# Altium PCB PCB_Audio Output.pcbdoc
Units mm, origin at the board's own origin, x right, y up, seen from the top; angles counter-clockwise.
Board outline 117.35 x 91.82 mm, 2 copper layers (Top Layer, Bottom Layer); 22 components, 13 nets, 84 pads, 0 vias.
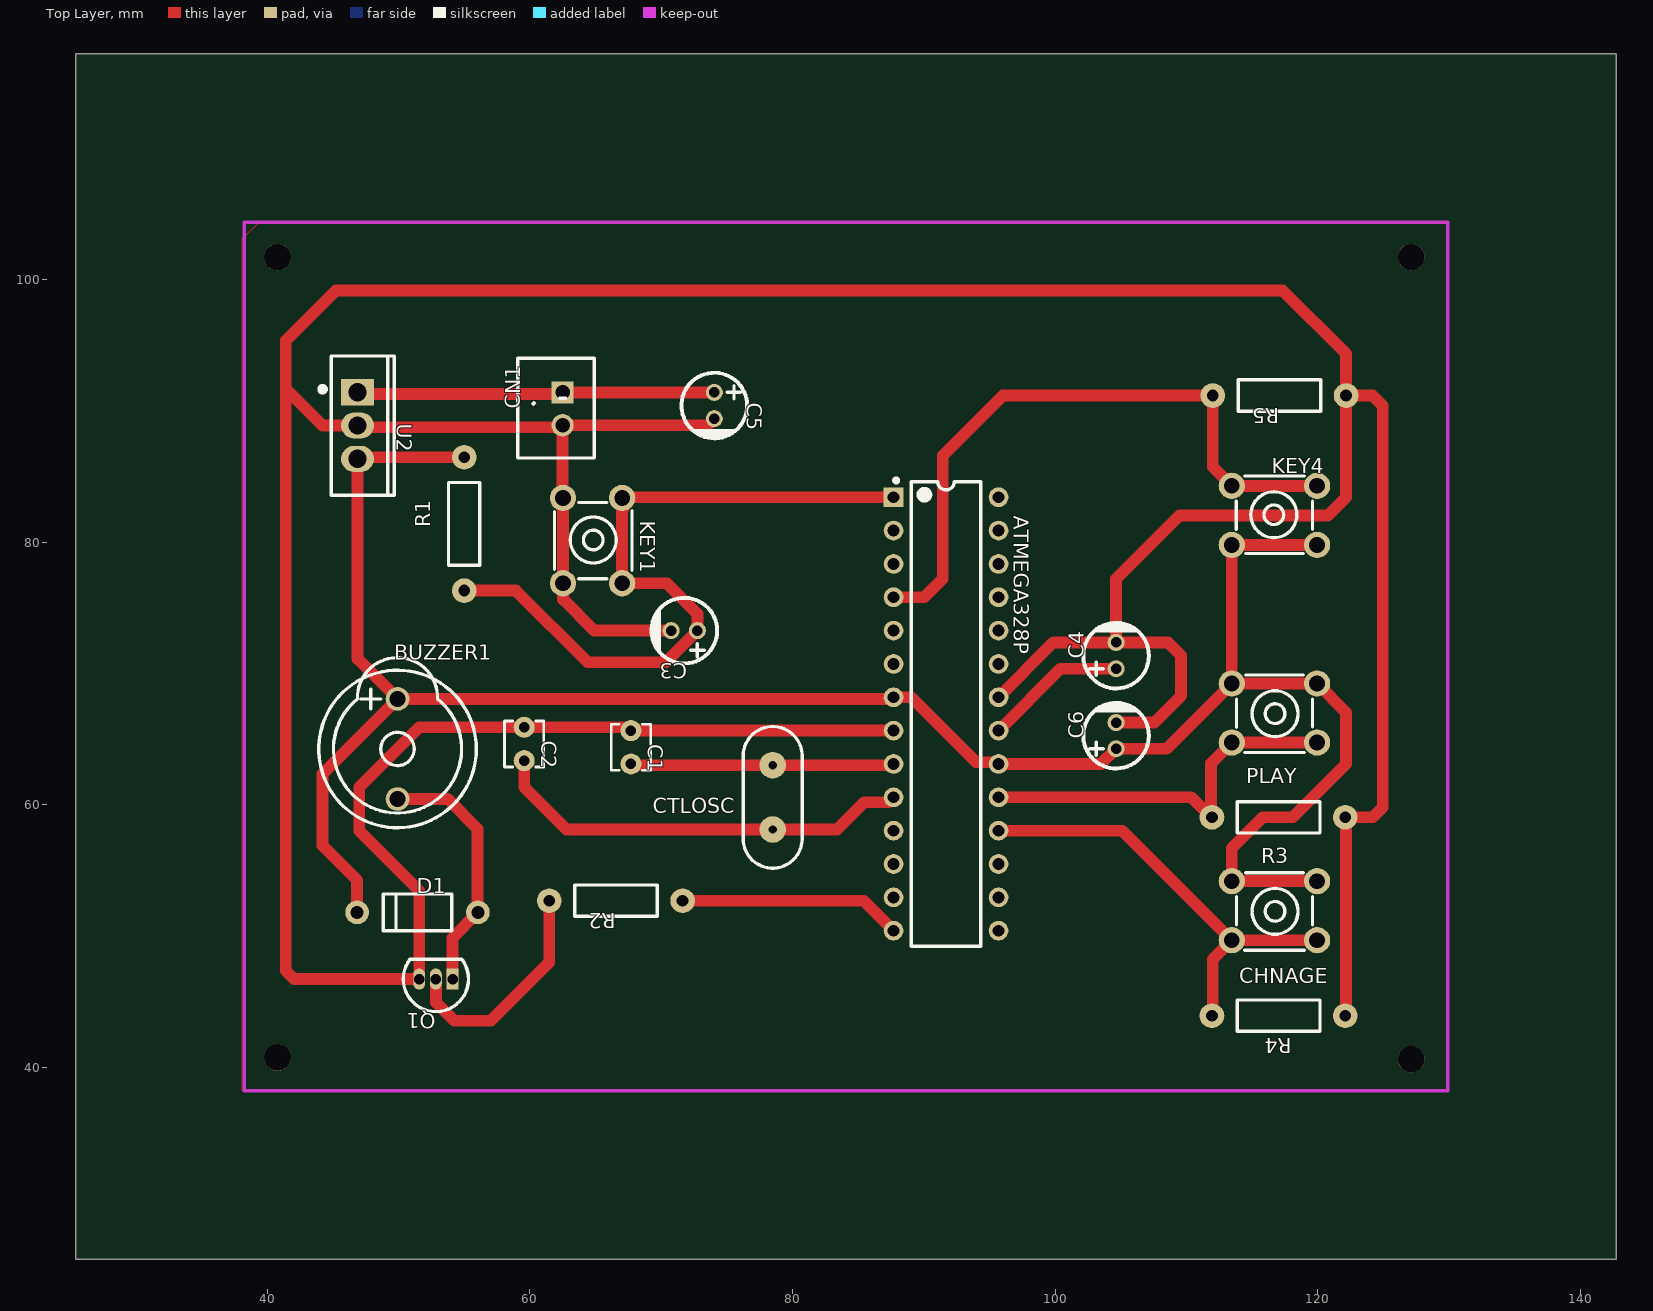
[diagram p0: Top Layer view]
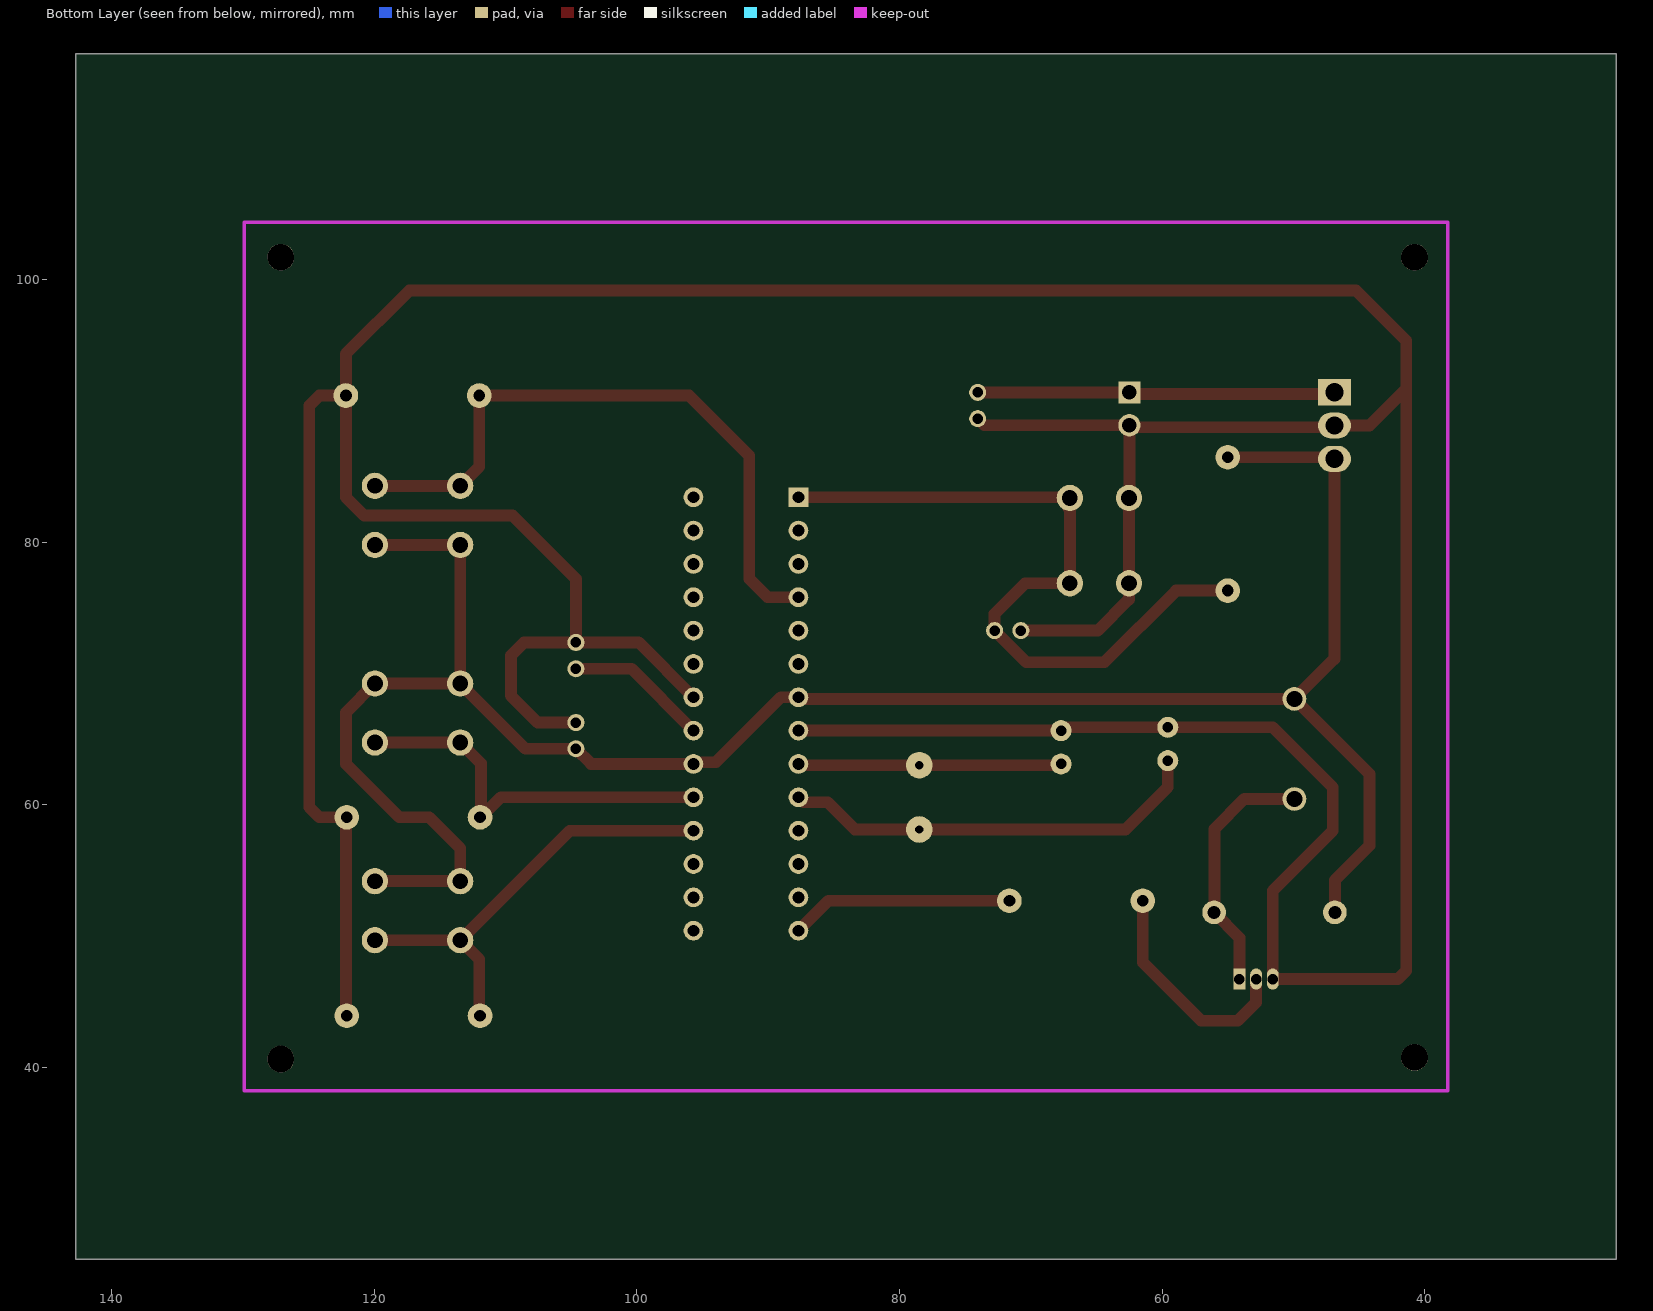
[diagram p1: Bottom Layer view, seen from below]

## Layer stack, top to bottom
Top Layer: signal copper (thickness not stored)
Dielectric: dielectric 0.32, FR-4, Dk 4.8
Bottom Layer: signal copper (thickness not stored)

## Board outline
142.748,25.4 25.4,25.4 25.4,117.221 142.748,117.221

## Components (designator, comment, footprint, x,y, rotation, side; value= is the part's Value field where it differs from the comment)
ATMEGA328P "ATMEGA _328P-PU" DIP-28_L34.6-W7.3-P2.54-LS10.2-BL 91.694,66.929 r270 top
BUZZER1 "5V_BUZZER" DIP-BUZZER-12X6 49.911,64.262 r0 top
C1 "22pF" CAP-TH_L3.5-W3.0-P2.54-D0.8 67.691,64.389 r270 top
C2 "22pF" CAP-TH_L3.5-W3.0-P2.54-D0.8 59.563,64.643 r270 top
C3 "100nF" CAP-TH_BD5.0-P2.00-D0.8-FD 71.755,73.279 r180 top
C4 "100nF" CAP-TH_BD5.0-P2.00-D0.8-FD 104.648,71.374 r90 top
C5 "330nF" CAP-TH_BD5.0-P2.00-D0.8-FD 74.041,90.424 r270 top
C6 "100nF" CAP-TH_BD5.0-P2.00-D0.8-FD 104.648,65.278 r90 top
CHNAGE "CHANGE SONG" KEY-TH_4P-L6.0-W6.0-P4.50 116.713,51.943 r180 top
CN1 "JST_2 PIN" CONN-TH_XHB-2A 62.484,90.17 r90 top
CTLOSC "16MHz" "16MHZ_OSC [PCB]" 78.486,60.579 r0 top
D1 "1N4001_Diode" DO-41_BD2.4-L4.7-P8.70-D0.9-RD 51.435,51.816 r0 top
KEY1 "Reset_Button" KEY-TH_4P-L6.0-W6.0-P4.50 64.77,80.137 r270 top
KEY4 "STOP" KEY-TH_4P-L6.0-W6.0-P4.50 116.713,82.057 r0 top
PLAY "PLAY" KEY-TH_4P-L6.0-W6.0-P4.50 116.713,67 r180 top
Q1 "BC547B_NPN_Transistor" TO-92-3_L4.9-W3.7-P1.27-L 52.832,46.736 r180 top
R1 "10K" AXIAL-0.4 54.991,81.407 r90 top
R2 "220Ω" AXIAL-0.4 66.548,52.705 r180 top
R3 "330Ω" AXIAL-0.4 117.03,59.055 r180 top
R4 "330Ω" AXIAL-0.4 117.03,43.942 r180 top
R5 "330Ω" AXIAL-0.4 117.094,91.186 r180 top
U2 "7805_Regulator" TO-220-3_L10.0-W4.5-P2.54-L 46.863,88.9 r270 top

## Footprints (in the part's own frame and the unit in brackets; to place one, negate y for a bottom-side part, rotate by r counter-clockwise, add the part's x,y. Pads: shape width x height; smd on the part's side, far side on the other; paste and mask are expansions set on the pad)
"16MHZ_OSC [PCB]" [mil]
  round 80 hole 25: 1(0,96.46) 2(0,-96.46)
  silkscreen extent -88,-212 88,212
AXIAL-0.4 [mil]
  round 74 hole 35.4: 1(-200,0) 2(200,0)
  silkscreen extent -124,-47 124,47
CAP-TH_BD5.0-P2.00-D0.8-FD [mm]
  round 1.3 hole 0.8: 1(-1,0) 2(1,0)
  silkscreen extent -2.5,-2.5 2.5,2.5
CAP-TH_L3.5-W3.0-P2.54-D0.8 [mm]
  round 1.6 hole 0.8: 1(-1.27,0) 2(1.27,0)
  silkscreen extent -1.75,-1.5 1.75,1.5
CONN-TH_XHB-2A [mm]
  rect 1.7x1.7 hole 1.1: 1(1.251,0)
  round 1.7 hole 1.1: 2(-1.251,0)
  silkscreen extent -3.75,-2.42 3.86,3.4
DIP-28_L34.6-W7.3-P2.54-LS10.2-BL [mm]
  rect 1.5x1.5 hole 0.9: 1(-16.51,-4)
  round 1.5 hole 0.9: 2(-13.97,-4) 3(-11.43,-4) 4(-8.89,-4) 5(-6.35,-4) 6(-3.81,-4) 7(-1.27,-4) 8(1.27,-4) 9(3.81,-4) 10(6.35,-4) 11(8.89,-4) 12(11.43,-4) 13(13.97,-4) 14(16.51,-4) 15(16.51,4) 16(13.97,4) 17(11.43,4) 18(8.89,4) 19(6.35,4) 20(3.81,4) 21(1.27,4) 22(-1.27,4) 23(-3.81,4) 24(-6.35,4) 25(-8.89,4) 26(-11.43,4) 27(-13.97,4) 28(-16.51,4)
  silkscreen extent -17.94,-3.95 17.7,2.65
DIP-BUZZER-12X6 [mm]
  round 1.8 hole 1.2: 1(0,3.81) 2(0,-3.81)
  silkscreen extent -6,-6 6,6.96
DO-41_BD2.4-L4.7-P8.70-D0.9-RD [mm]
  round 1.8 hole 1: 1(-4.6,0) 2(4.6,0)
  silkscreen extent -2.6,-1.4 2.6,1.4
KEY-TH_4P-L6.0-W6.0-P4.50 [mm]
  round 2 hole 1.2: 1(-3.25,-2.25) 2(3.25,-2.25) 3(3.25,2.25) 4(-3.25,2.25)
  silkscreen extent -2.9,-2.9 2.9,3
TO-92-3_L4.9-W3.7-P1.27-L [mm]
  rect 0.9x1.6 hole 0.8: 1(-1.27,0)
  oval 0.9x1.6 hole 0.8: 2(0,0) 3(1.27,0)
  silkscreen extent -2.48,-1.5 2.48,2.48
TO-220-3_L10.0-W4.5-P2.54-L [mm]
  rect 2x2.5 hole 1.4: 1(-2.54,0)
  oval 2x2.5 hole 1.4: 2(0,0) 3(2.54,0)
  silkscreen extent -5.3,-2.86 5.3,2.8

## Free pads (board coordinates)
  round 2.032 hole 2.032 unplated: ""(40.767,40.767) ""(40.767,101.727) ""(127.127,40.64) ""(127.127,101.727)

## Nets (pads, with @x,y where several pads share a name; then routed paths per layer and width w, separated by ;. In a path a pad name is that pad's centre, name@x,y a point inside that pad or via, vN(x,y) a via of type N, cw(c..) or ccw(c..) an arc to the next point about the centre after c; other vN are vias at no path point)
5V: ATMEGA328P.7 ATMEGA328P.20 BUZZER1.1 C6.1 CHNAGE.1 CHNAGE.2 D1.1 KEY4.1 KEY4.2 PLAY.1 PLAY.2 R1.2 U2.3 | length 166.6
  Top Layer w0.9: D1.1 46.835,54.257 44.196,56.896 44.196,62.357 BUZZER1.1 ; U2.3@46.863,86.233 46.863,71.12 BUZZER1.1 ; U2.3 46.863,86.487 R1.2 ; CHNAGE.2 CHNAGE.1@119.963,54.193 ; CHNAGE.2 113.464,56.695 115.824,59.055 118.11,59.055 122.174,63.119 122.174,67.038 PLAY.1 ; PLAY.1 PLAY.2@113.463,69.25 ; KEY4.2 KEY4.1 PLAY.2@113.463,69.25 ; BUZZER1.1 87.567,68.072 ATMEGA328P.7 89.027,68.199 93.98,63.246 95.567,63.246 ATMEGA328P.20 103.489,63.119 C6.1 108.491,64.278 PLAY.2@113.463,69.25
BUZZER: ATMEGA328P.14 R2.1 | length 17
  Top Layer w0.9: R2.1 85.408,52.705 ATMEGA328P.14
BUZZER1_2: BUZZER1.2 D1.2 Q1.1 | length 19.3
  Top Layer w0.9: BUZZER1.2 53.721,60.452 56.007,58.166 56.007,51.844 D1.2 54.102,49.883 Q1.1
CHANGE: ATMEGA328P.18 CHNAGE.3 CHNAGE.4 R4.2 | length 34.1
  Top Layer w0.9: ATMEGA328P.18 105.117,58.039 CHNAGE.3 ; R4.2@112.014,43.942 112.014,48.244 CHNAGE.3 ; CHNAGE.4@119.963,49.693 CHNAGE.3
GND: ATMEGA328P.8 ATMEGA328P.22 C1.1 C2.1 C3.2 C4.2 C5.2 C6.2 CN1.2 KEY1.1 KEY1.2 Q1.3 R3.1 R4.1 R5.1 U2.2 | length 371.7
  Top Layer w0.9: 41.402,91.693 44.195,88.9 U2.2 ; U2.2@46.863,88.773 62.338,88.773 CN1.2 ; KEY1.2 KEY1.1 62.484,83.387 CN1.2 ; KEY1.2 62.52,75.656 64.897,73.279 C3.2 ; C5.2 73.536,88.919 CN1.2 ; ATMEGA328P.8 C1.1 67.691,65.913 C2.1 57.16,65.913 51.562,65.913 46.99,61.341 46.99,58.039 51.562,53.467 Q1.3 42.037,46.736 41.402,47.371 41.402,95.377 45.212,99.187 117.348,99.187 122.174,94.361 R5.1 ; ATMEGA328P.22 99.869,72.374 C4.2 ; C6.2 107.553,66.278 109.601,68.326 109.601,71.374 108.601,72.374 C4.2 ; R4.1@122.174,43.942 122.174,59.055 122.047,59.055 124.206,59.055 124.968,59.817 124.968,90.424 124.206,91.186 R5.1 ; C4.2 104.648,77.216 109.474,82.042 120.777,82.042 122.174,83.439 R5.1
PLAY: ATMEGA328P.19 PLAY.3 PLAY.4 R3.2 | length 29.7
  Top Layer w0.9: ATMEGA328P.19 110.363,60.579 111.887,59.055 111.887,63.174 113.463,64.75 PLAY.4
Q1_2: Q1.2 R2.2 | length 17.5
  Top Layer w0.9: Q1.2 52.832,44.958 54.229,43.561 57.023,43.561 61.468,48.006 R2.2
STOP: ATMEGA328P.4 KEY4.3 KEY4.4 R5.2 | length 50.2
  Top Layer w0.9: ATMEGA328P.4 90.043,75.819 91.44,77.216 91.44,86.614 96.012,91.186 R5.2 112.014,85.756 KEY4.4 KEY4.3
U1_1: ATMEGA328P.1 C3.1 KEY1.3 KEY1.4 R1.1 | length 55.5
  Top Layer w0.9: R1.1 58.928,76.327 64.389,70.866 70.342,70.866 C3.1 72.755,74.565 70.433,76.887 KEY1.3 67.02,82.498 KEY1.4@67.147,82.625 ; KEY1.4 67.072,83.439 ATMEGA328P.1
U1_9: ATMEGA328P.9 C1.2 CTLOSC.1 | length 20.1
  Top Layer w0.9: C1.2 67.781,63.029 CTLOSC.1 87.604,63.029 ATMEGA328P.9
U1_10: ATMEGA328P.10 C2.2 CTLOSC.2 | length 32.5
  Top Layer w0.9: C2.2 59.563,61.341 62.775,58.129 CTLOSC.2 83.402,58.129 85.471,60.198 87.313,60.198 ATMEGA328P.10
U1_21: ATMEGA328P.21 C4.1 | length 10.9
  Top Layer w0.9: ATMEGA328P.21 100.409,70.374 C4.1
VCC: C5.1 CN1.1 U2.1 | length 27.2
  Top Layer w0.9: U2.1@46.863,91.313 62.376,91.313 62.484,91.421 74.038,91.421 C5.1
pads on no net: ATMEGA328P.2 ATMEGA328P.3 ATMEGA328P.5 ATMEGA328P.6 ATMEGA328P.11 ATMEGA328P.12 ATMEGA328P.13 ATMEGA328P.15 ATMEGA328P.16 ATMEGA328P.17 ATMEGA328P.23 ATMEGA328P.24 ATMEGA328P.25 ATMEGA328P.26 ATMEGA328P.27 ATMEGA328P.28

## Polygon pours and split planes (outlines as drawn)
GND on Top Layer (solid): 38.1,103.124 39.37,104.394 129.921,104.394 129.921,38.227 38.227,38.227 38.1,38.227